# EAGLE board Cat_layout (EAGLE 7.0.0)
Cin=100uf
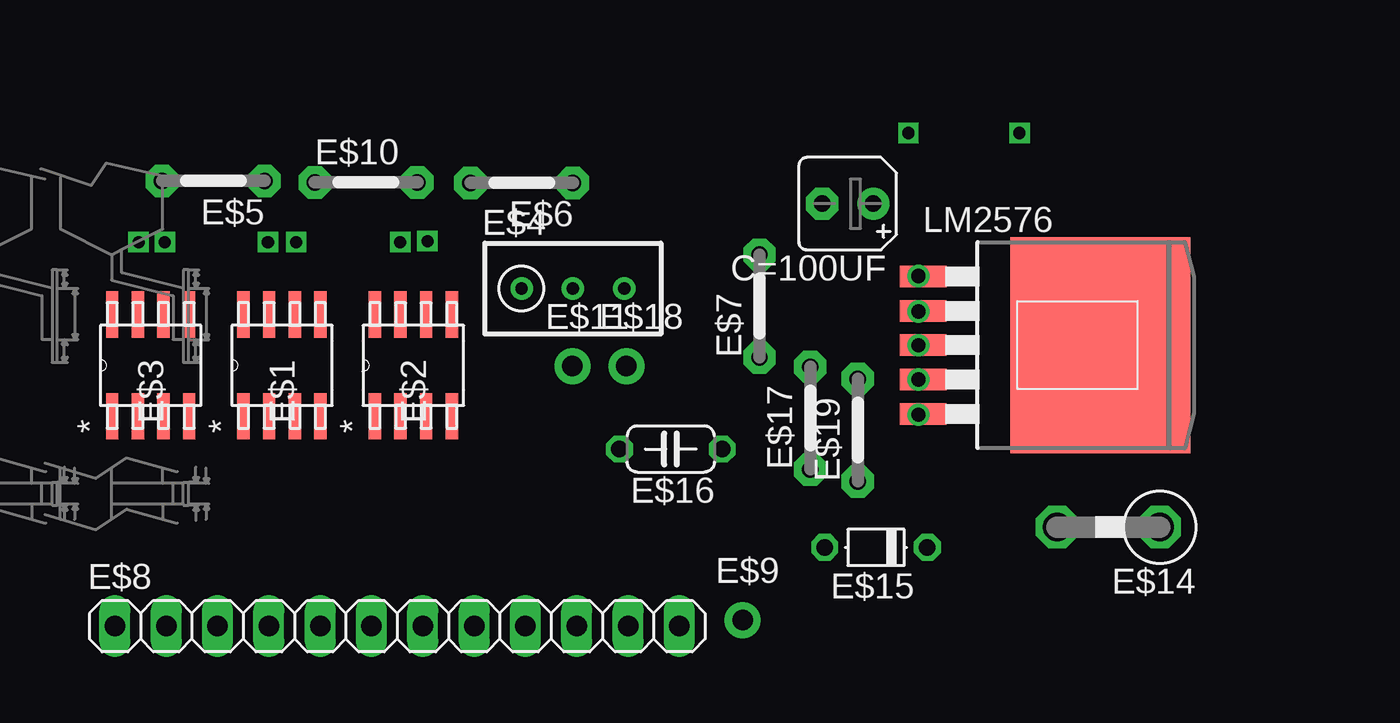
[diagram p0: board, top side]
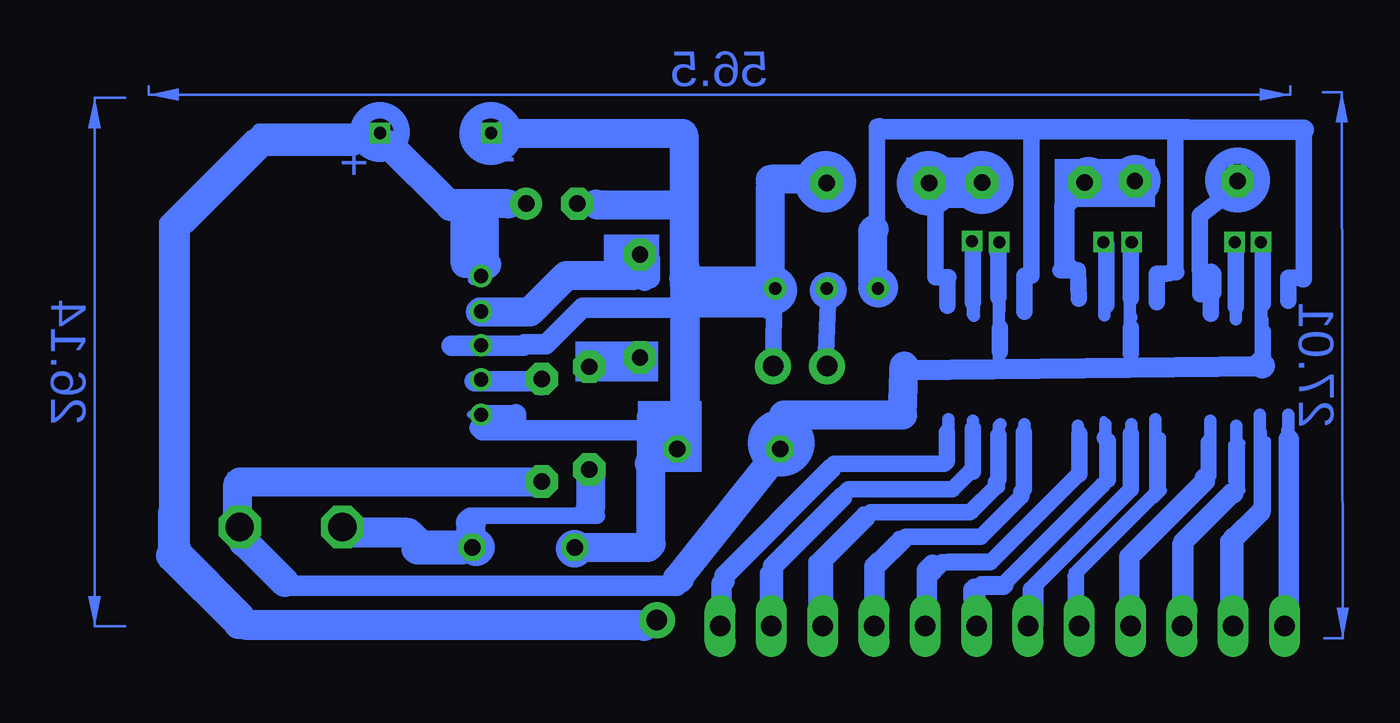
[diagram p1: board, bottom side, seen from below]

No outline drawn. Coordinates in mm, seen from the top.
Copper layers (1*16): Top 0.035mm / dielectric 1.5mm / Bottom 0.035mm
Design rules "default": minimum track width 10mil, minimum drill 24mil, track to track 8mil, track to pad 8mil, pad to pad 8mil, via to via 8mil, smd to smd 8mil, copper to edge 40mil, drill to drill 8mil, minimum pad ring 10mil, minimum via ring 8mil, stop-mask expansion 4mil, vias tented up to drill 0mil, thermal gap 10mil

## Footprints (pad centres in the part's own frame; a part is rotated, then mirrored left to right if it is on the bottom)
B45181A = drill 0.813 pad 1.6: + -1.27,0 | drill 0.813 pad 1.6 octagon: - 1.27,0
M08A-M = smd 2.286 x 0.61: 1 -2.515,1.905; 2 -2.515,0.635; 3 -2.515,-0.635; 4 -2.515,-1.905; 5 2.515,-1.905; 6 2.515,-0.635; 7 2.515,0.635; 8 2.515,1.905
RTRIM3296W = drill 0.61: 1 0,-2.54; 2 0,0; 3 0,2.54
05 = drill 0.813 pad 1.6 octagon: 1 -2.54,0; 2 2.54,0
1X12 = drill 1.016 long: 1 -13.97,0; 2 -11.43,0; 3 -8.89,0; 4 -6.35,0; 5 -3.81,0; 6 -1.27,0; 7 1.27,0; 8 3.81,0; 9 6.35,0; 10 8.89,0; 11 11.43,0; 12 13.97,0
1X01-CLEANBIG = drill 1.016 pad 1.778: 1 0,0
C1702-05 = drill 1.397 octagon: A 2.54,0; C -2.54,0
D-5 = drill 0.813 octagon: A 2.54,0; C -2.54,0
C050-024X044 = drill 0.813 octagon: 1 -2.54,0; 2 2.54,0
DDPAK5(Q) = smd 1.067 x 2.286: 1 -3.404,-8.763; 2 -1.702,-8.763; 3 0,-8.763; 4 1.702,-8.763; 5 3.404,-8.763 | smd 10.668 x 8.89: TAB 0,0

## Placement (x,y rotation side)
C=100UF  [B45181A]  67,76.5 180 top
E$1  [M08A-M]  39,68.5 90 top
E$2  [M08A-M]  45.5,68.5 90 top
E$3  [M08A-M]  32.5,68.5 90 top
E$4  [RTRIM3296W]  53.4,72.3 270 top
E$5  [05]  35.6,77.62 180 top
E$6  [05]  50.86,77.53 180 top
E$7  [05]  62.63,71.44 90 top
E$8  [1X12]  44.7,55.6 0 top
E$9  [1X01-CLEANBIG]  61.8,55.9 0 top
E$10  [05]  43.16,77.55 0 top
E$11  [1X01-CLEANBIG]  53.38,68.46 0 top
E$14  [C1702-05]  79.9,60.5 180 top
E$15  [D-5]  68.4,59.5 180 top
E$16  [C050-024X044]  58.24,64.36 180 top
E$17  [05]  65.14,65.89 90 top
E$18  [1X01-CLEANBIG]  56.05,68.47 0 top
E$19  [05]  67.5,65.3 90 top
LM2576  [DDPAK5(Q)]  79.5,69.5 270 top

## Library data of the parts
C=100UF E$4 E$14 E$15 = ref-packages-longpad
E$1-E$3 = catlm
E$5-E$7 E$10 E$17 E$19 = Misc
E$8 E$9 E$11 E$18 = adafruit
E$16 = PAsystem
LM2576 = PowerProducts

## Nets
S$103: E$18.1

## Tracks (layer width: path | path; a pad name or v marks a point on that pad's centre or on a via)
S$1
  Bottom 0.5: 51,72.3 51,75.52 51,75.6
  Bottom 0.61: 51,75.52 51,75.55
S$2
  Bottom 0.406: 79.4,57.5 82.4,60.5 81.9,60.5
S$3
  Bottom 0.61: 30.6,65.3 30.6,55.6
S$4
  Bottom 0.61: 58.48,55.92 58.96,55.44
S$5
  Bottom 0.406: 60.4,57.8 79.7,57.8
S$6
  Bottom 0.61: 47.36,65.84 47.36,63.68 47.44,63.6 52.8,63.6 58.56,57.84
S$7
  Bottom 0.61: 58.64,57.76 58.64,55.6 59.04,55.2
S$8
  Bottom 0.5: 75.6,79.9 81.9,79.9 86.2,75.6 86.2,59.9 82,55.7 61.8,55.7 61.4,56.1
S$9
  Bottom 0.406: 34.3,65.5 34.5,65.7
S$10
  Bottom 0.61: 56.4,55.52 56.08,55.2
S$11
  Bottom 0.61: 48.56,55.6 48.4,55.44
S$12
  Bottom 0.61: 44.8,65.6 44.88,65.52 44.88,62.48
S$13
  Bottom 0.61: 39.6,65.6 39.6,62.64 44.48,57.76 45.76,57.76
S$14
  Bottom 0.61: 43.6,65.6 43.6,62.24 45.84,60 49.84,60 51.12,58.72 51.12,55.52 51.2,55.44
S$15
  Bottom 0.61: 46.16,65.76 46.16,63.28 47.12,62.32 52.32,62.32 56.4,58.24 56.4,55.28 56.32,55.2
S$16
  Bottom 0.61: 44.96,62.4 46.16,61.2 51.6,61.2 54,58.8 54,55.6 53.92,55.52
S$17
  Bottom 0.61: 38.32,65.6 38.32,62.4 42.96,57.76 42.96,55.68 43.28,55.36
S$18
  Bottom 0.813: 47.41,71.46 47.41,72.83 47.38,72.86 48.01,72.86 48.01,76.91
S$19  (via drill 0.7)
  Bottom 0.406: 71,69.5 v70.5,69.5
S$20
  Bottom 0.61: 38.32,70.88 38.4,70.96 38.4,74.56
S$21
  Bottom 0.5: 74.5,60.6 77.4,60.6 77.5,60.5
S$22
  Bottom 0.5: 60.6,69.4 60.6,69.5
S$23
  Bottom 0.61: 46.16,71.04 46.16,72.64
S$24
  Bottom 1.016: 63.47,72.88 63.47,73.08 62.46,74.09 62.46,72.75 62.4,72.68
S$25  (via drill 0.7)
  other vias: 70.5,67.8
S$26  (via drill 0.7)
  other vias: 70.5,71.17
S$27
  Bottom 0.61: 39.66,70.99 39.66,74.51
S$28
  Bottom 1.016: 35.54,80.18 50.77,80.18 50.77,80.24
S$29
  Bottom 0.813: 34.38,71.06 34.38,73.1
S$30
  Bottom 0.61: 50.97,75.42 50.84,75.42 50.84,80.24
S$31
  Bottom 1.422: 54.31,77.7 56.18,77.7 56.18,77.57
S$32
  Bottom 0.61: 33.14,70.79 33.14,74.57
S$33
  Bottom 0.61: 31.89,70.85 31.89,74.74
S$34
  Bottom 0.61: 56,78.06 56,72.27 56.17,72.1
S$35
  Bottom 1.422: 60.79,57.96 60.66,57.96 60.66,58.09 55.58,64.45 55.52,66.06 49.64,66.06 49.57,68.2 49.57,68.47
S$36
  Bottom 0.61: 62.65,73.08 66.43,73.08 66.63,72.88 62.68,72.88 62.65,72.91
S$37
  Bottom 0.61: 37.12,65.84 37.12,62.08 40.96,58.24 40.96,55.36 40.88,55.28
S$38
  Bottom 0.61: 70.52,71.29 70.6,71.21
S$39
  Bottom 0.813: 34.92,73.2 34.92,75.94 33.19,77.24
S$40
  Bottom 0.5: 40.34,77.96 40.24,78.06
S$41
  Bottom 0.406: 34.5,65.1 34.4,65
S$42  (via drill 0.6, 0.7)
  Bottom 0.406: 76,80 v75.5,80 72,76.5 71,76.5 | 71,72.92 71,76.5 | 68,76.5 70.5,76.5 | 70.5,76.5 71,76.5 | v70.5,72.92 70.5,76.5
S$43
  Bottom 0.5: 60.7,72.6 60.7,72.2 56,72.2 56,72.5 60.8,72.5 60.9,72.4 | 60.9,72.4 60.9,72.6 | 60.9,72.6 60.9,79.5 61.1,79.7 70,79.7 70.1,79.8 60.8,79.8 60.8,72.7 60.9,72.6 | 60.9,72.4 60.9,66.4 61.3,66
S$44
  Bottom 0.61: 66.61,72.95 67.66,71.9
S$45
  Bottom 0.406: 62.1,63.3 62,63.3 62,61.1 62.3,61.1
  Bottom 0.5: 62.1,63.3 62.1,65.9
S$46
  Bottom 0.5: 75.6,80.1 75.8,80.1 75.8,80 72.1,76.3 70.7,76.3 70.7,72.92 70.9,72.72
S$47
  Bottom 1.422: 65.08,63.04 65.08,61.4 65.11,61.37
S$48
  Bottom 1.422: 82.54,60.6 82.54,62.64 82.44,62.74 67.75,62.74 67.69,62.67
S$49
  Bottom 0.5: 70.5,71.07 70.7,70.87 70.7,70.9
S$50
  Bottom 0.5: 70.4,65.76 70.8,66.16
S$51
  Bottom 0.5: 79.6,57.6 82.4,60.4
S$52  (via drill 0.6)
  other vias: 31.9,74.6
S$53  (via drill 0.6)
  other vias: 33.2,74.6
S$54  (via drill 0.6)
  other vias: 38.3,74.6
S$55  (via drill 0.6)
  other vias: 39.7,74.6
S$56  (via drill 0.6)
  other vias: 44.85,74.6
S$57  (via drill 0.6)
  other vias: 46.2,74.65
S$58  (via drill 0.7)
  Bottom 0.406: v70.5,66.06 71,66.06
S$59
  Bottom 0.5: 70.2,69.7 70.4,69.5
S$60  (via drill 0.6)
  Bottom 0.406: 60.7,80 62,80
  Bottom 0.5: v70,80 62,80 61.9,80 | 60.7,79.9 60.7,80 60.6,80 60.6,76.5 65.8,76.5
S$61
  Bottom 0.61: 34.4,65.76 34.4,63.04 38.4,59.04 38.4,55.36 38.32,55.28
S$62
  Bottom 0.61: 33.36,62.32 36,59.68 36,55.68 35.92,55.6
S$63
  Bottom 0.61: 31.92,65.2 31.92,61.52 33.6,59.84 33.6,55.52 33.52,55.44
S$64
  Bottom 0.406: 39.7,65.8 39.6,65.7
S$65
  Bottom 0.61: 60.72,57.6 60.8,57.6
S$66
  Bottom 1.016: 49.5,68.26 31.73,68.47
S$67
  Bottom 0.61: 45.84,57.68 45.84,55.76 46,55.6
S$68
  Bottom 0.61: 40.96,65.52 40.96,63.12 45.2,58.88 47.36,58.88 48.56,57.68 48.56,55.36
S$69
  Bottom 0.61: 33.12,65.52 33.12,62.56 33.28,62.4
S$70
  Bottom 0.61: 62.08,61.92 62.08,61.12
S$71
  Bottom 0.61: 62.48,60.72 62.16,61.04 62.16,61.12
S$72
  Bottom 0.61: 40.39,77.99 40.31,78.07
S$73
  Bottom 0.61: 31.92,71.84 31.92,68.56
S$74
  Bottom 0.61: 38.4,70.96 38.4,68.8
S$75
  Bottom 0.61: 44.88,72.88 44.88,68.72
S$76
  Bottom 0.813: 30.55,71.69 30.55,72.83 29.78,72.83
S$77
  Bottom 0.813: 29.85,72.76 29.78,72.76 29.78,80.15
  Bottom 1.016: 29.78,80.15 36.36,80.15 36.36,80.18
S$78
  Bottom 1.422: 60.26,71.61 56.18,71.61 56.18,71.48
S$79
  Bottom 0.61: 70.66,66.07 70.71,66.02
S$80
  Bottom 0.406: 79.6,57.6 79.5,57.5 60.8,57.5 60.4,57.9 60.6,57.9
S$81
  Bottom 0.5: 70.9,59.6 71,59.5
S$82
  Bottom 0.5: 70.9,59.5 73.4,59.5
S$83
  Bottom 0.61: 70.85,59.52 70.91,59.46 73.38,59.46 74.49,60.57
S$84
  Bottom 0.61: 30.56,66.05 30.56,55.42
S$85
  Bottom 0.61: 31.97,66.05 31.97,61.48 33.61,59.84 33.61,55.6 33.57,55.56
S$86
  Bottom 0.61: 44.85,71.24 44.85,74.54 44.9,74.59
S$87
  Bottom 0.61: 46.11,70.95 46.11,74.64
S$88
  Bottom 0.61: 61.97,63.53 62.01,63.49 | 62.01,63.49 62.01,65.83 | 62.01,63.49 62.01,61.18
S$89
  Bottom 0.61: 62.21,65.92 62.21,61.22
S$90
  Bottom 0.61: 72.87,59.44 73.43,59.44 74.3,60.31 | 74.3,60.31 74.47,60.48 | 74.3,60.31 77.4,60.31 77.63,60.54
S$91
  Bottom 0.61: 71.05,59.57 73.35,59.57 73.47,59.45 73.47,59.65 74.48,60.66 77.46,60.66 77.54,60.74
S$92
  Bottom 0.61: 70.89,59.52 71.01,59.4
S$93
  Bottom 0.61: 64.88,71.42 62.63,71.42
S$94
  Bottom 0.813: 71.06,61.06 64.75,61.06
S$95
  Bottom 1.016: 71.42,59.83 73.62,59.83 74.26,60.46
S$96
  Bottom 1.422: 77.16,60.23 74.09,60.23 73.69,59.83
S$97
  Bottom 1.422: 71.42,59.36 73.66,59.36 73.73,59.43
S$98
  Bottom 0.61: 68.02,71.54 70.65,71.54 70.73,71.46
S$99
  Bottom 0.61: 60.69,79.92 62.15,79.92
S$100
  Bottom 0.61: 62.54,68.18 62.94,68.18
S$101
  Bottom 0.61: 75.89,79.7 81.86,79.7 86.06,75.5 86.06,60.01 81.86,55.81 62.13,55.81 61.89,56.05
S$102
  Bottom 0.813: 53.31,72.15 53.45,68.53
S$103
  Bottom 0.813: 55.98,72.21 E$18.1
S$104
  Bottom 0.813: 40.92,71.79 40.95,73.16 40.95,73.2 41.82,73.2
S$105
  Bottom 0.61: 46.18,72.07 46.18,74.7 46.27,74.79
S$106
  Bottom 0.61: 44.89,71.84 44.89,74.5 44.98,74.59
S$107
  Bottom 0.61: 50.86,72.12 50.86,75.4 50.92,75.46
S$108
  Bottom 0.61: 61.08,76.33 65.7,76.33 65.84,76.47
S$109
  Bottom 0.813: 37.05,71.63 37.05,73.03 36.58,73.03
S$111
  Bottom 0.813: 43.61,71.16 43.61,72.93 43.27,72.93 43.27,80.12
S$112
  Bottom 0.61: 82.51,60.23 82.32,60.23 79.68,57.59
S$113
  Bottom 1.422: 70.99,59.49 70.99,60.66 71.02,60.7
S$114
  Bottom 0.61: 62.01,56.08 81.77,56.08 81.89,55.96 81.89,56 85.92,60.03 85.92,75.38 85.87,75.43 85.87,75.52 81.83,79.56
S$115
  Bottom 0.61: 75.87,80.17 81.5,80.17 82.37,79.3
S$116
  Bottom 0.813: 50.91,75.49 50.91,72.75 50.97,72.68
S$117
  Bottom 0.61: 31.84,70.78 31.84,68.48 31.84,68.42
  Bottom 1.27: 31.91,68.55 31.84,68.48
S$118
  Bottom 1.016: 51.04,56.62 51.04,58.56 50.84,58.76 50.77,58.76 49.7,59.83
S$119
  Bottom 1.016: 53.58,56.22 53.58,58.63 53.71,58.76 51.51,60.97
S$120
  Bottom 1.016: 56.05,56.95 56.05,58.57 52.64,61.97
S$121
  Bottom 1.016: 58.59,56.48 58.59,57.69 58.45,57.82 58.45,58.1 53.18,63.38
S$122
  Bottom 1.016: 33.27,59.97 33.27,56.48 33.4,56.35 33.4,59.76 33.2,59.97 31.93,61.24
S$123
  Bottom 1.016: 33.27,62.17 33.33,62.17 35.74,59.76 35.74,56.82 35.81,56.75
S$124
  Bottom 1.016: 34.67,62.91 34.67,62.77 38.41,59.03 38.41,56.48
S$125
  Bottom 1.016: 30.53,64.85 30.53,56.28
S$126
  Bottom 0.406: 34.67,63.11 34.67,64.78 34.6,64.85
S$127
  Bottom 0.406: 33.2,62.58 33.2,64.45 33.34,64.58 33.34,62.77 32.87,62.31 32.87,64.65 33,64.78
S$128
  Bottom 0.406: 31.6,61.3 31.6,64.78
S$129
  Bottom 0.406: 36.81,64.98 36.81,62.51 36.88,62.44
S$130
  Bottom 0.406: 36.81,62.37 37.14,62.37 41.22,58.29
S$131
  Bottom 0.406: 41.29,58.09 41.29,56.55
S$132
  Bottom 0.406: 37.21,61.84 36.74,62.31
S$133
  Bottom 0.813: 46.23,56.95 46.23,57.42 46.1,57.56 44.63,57.56 44.56,57.62 44.56,57.77 39.75,62.58
S$134
  Bottom 0.813: 39.48,62.84 39.48,64.78 39.62,64.92
S$135
  Bottom 0.813: 38.35,65.12 38.35,62.37 43.29,57.42 43.29,56.22
S$136
  Bottom 0.813: 40.88,65.12 40.88,63.11 40.94,63.11 45.29,58.76 47.7,58.76 47.9,58.56
S$137
  Bottom 1.016: 48.43,56.48 48.43,58.36 48.17,58.63
S$138
  Bottom 0.813: 43.62,65.19 43.62,62.38 43.76,62.24 43.76,62.04 45.76,60.03 49.5,60.03
S$139
  Bottom 0.813: 44.89,65.05 44.89,62.84 45.03,62.71 45.03,62.51 46.3,61.24 51.24,61.24 51.31,61.17
S$140
  Bottom 0.813: 46.16,65.39 46.16,63.24 46.3,63.24 47.16,62.37
S$141
  Bottom 0.813: 47.23,62.37 52.17,62.37
S$142
  Bottom 0.813: 52.84,61.84 52.31,62.37
S$143
  Bottom 0.813: 47.43,65.19 47.43,63.78 47.57,63.65 53.04,63.65
S$145
  Bottom 0.813: 31.8,71.54 31.8,73.95
S$146
  Bottom 0.813: 33.14,71.41 33.14,74.09
S$147
  Bottom 0.813: 36.43,73.06 36.39,73.1 36.09,73.1 36.13,73.13 36.13,79.88
S$148
  Bottom 0.813: 34.36,73.1 arc-90 34.39,73.13
S$149
  Bottom 0.813: 38.35,71.81 38.35,74.35 38.41,74.42
S$150
  Bottom 0.813: 39.55,71.48 39.55,74.49 39.68,74.62
S$151
  Bottom 0.813: 34.86,73.23 34.89,73.2 34.89,72.03 34.32,72.03 34.26,72.09 34.26,73.03
S$153
  Bottom 0.813: 44.89,71.88 44.89,74.09 44.96,74.15
S$154
  Bottom 0.813: 46.16,71.61 46.16,74.22
S$156
  Bottom 1.016: 41.47,73.36 41.64,73.36 41.64,76.41 40.6,77.44
S$161
  Bottom 1.422: 69.28,79.98 60.53,79.98 60.46,79.91 60.46,72.81 60.33,72.68 56.25,72.68 56.18,72.61 56.18,77.23
S$162
  Bottom 0.813: 51.04,75.22 50.91,75.22 50.91,80.31
  Bottom 1.422: 51.11,72.68 51.11,75.16 51.04,75.22
S$164
  Bottom 1.422: 61.19,76.43 64.73,76.43 64.8,76.5
S$165
  Bottom 1.422: 69.14,76.5 71.88,76.5 72.02,76.36 72.02,76.37 75.09,79.44
S$166
  Bottom 1.422: 70.35,75.63 70.35,73.62 70.21,73.48
S$167
  Bottom 1.422: 71.28,73.55 71.28,75.76
S$168
  Bottom 1.422: 70.55,71.14 68.08,71.14 66.54,72.68 66.27,72.95 62.93,72.95 62.86,73.02
S$169
  Bottom 1.016: 71.95,69.47 68.41,69.47 68.34,69.53 67.28,69.53 65.47,71.34 60.79,71.34
S$170
  Bottom 1.016: 62.13,72.81 62.13,73.75
S$171
  Bottom 0.61: 70.12,66 70.4,66.28
S$172
  Bottom 1.422: 60.41,73.43 60.41,65.98 62.05,65.98 62.08,65.94 62.08,63.6 62.11,63.57 62.11,63.37
S$173
  Bottom 1.016: 60.98,66.08 60.91,66.01
S$174
  Bottom 1.016: 62.61,68.82 64.68,68.82 65.05,68.45
S$175
  Bottom 1.016: 62.81,68.22 64.81,68.22 64.85,68.25
S$176
  Bottom 1.422: 65.31,59.49 62.24,59.49 62.08,59.66 62.08,63.54 62.18,63.64
S$177
  Bottom 0.406: 66.1,59.4 65.9,59.6 63.8,59.6 64,59.4 | 64,59.4 66,59.4 | 63.7,59.4 64,59.4
  Bottom 0.5: 66.1,59.4 66.2,59.5
S$178
  Bottom 0.406: 62.2,63.3 62.2,60.9
S$179
  Bottom 1.422: 82.27,59.73 82.17,59.73 80.2,57.76
S$180
  Bottom 1.016: 80.13,57.59 60.81,57.59 60.58,57.82 60.55,57.82
S$181
  Bottom 0.813: 44.82,70.36 44.82,69.19
S$182
  Bottom 0.813: 38.35,70.36 38.35,69.09
S$183
  Bottom 0.813: 31.81,70.16 31.81,68.55 31.77,68.52
S$184
  Bottom 1.422: 76.9,79.57 81.37,79.57 85.32,75.62
S$185
  Bottom 1.422: 85.64,75.27 85.64,59.53 85.57,59.46 85.57,59.22 82.4,56.05
S$186
  Bottom 1.422: 82.2,55.65 62.48,55.65 62.41,55.58
S$187
  Bottom 1.422: 82.5,55.68 82.5,55.72 85.77,58.99 | 85.77,58.99 85.87,59.09 | 85.77,61.2 85.77,58.99
S$188
  Bottom 0.5: 60.9,66 60.9,66.3 61.2,66 60.6,66
S$189
  Bottom 1.016: 70.44,66.09 70.44,65.42
S$190
  Bottom 1.016: 70.31,66.02 68.9,66.02
S$191
  Bottom 1.016: 68.77,66.09 68.77,65.35 68.83,65.29 | 68.83,65.29 68.77,65.29 62.29,65.29 62.09,65.49 | 68.83,65.29 70.44,65.29 70.57,65.42
S$192
  Bottom 1.016: 70.84,80.23 70.84,80.17 70.04,79.36
S$193
  Bottom 1.016: 70.81,67.73 67.54,67.73 67.54,67.53
S$195
  Bottom 0.61: 40.39,78.06 40.3,78.15
(copper drawn outside any net)
  shapes: Bottom area x8, Bottom circle x15

## Text on the board
Bottom: - | +